# Altium PCB pcb.PcbDoc
Units mil, origin at the board's own origin, x right, y up, seen from the top; angles counter-clockwise.
Board outline 2362.2 x 1181.1 mil, 2 copper layers (Top Layer, Bottom Layer); 40 components, 23 nets, 146 pads, 79 vias.
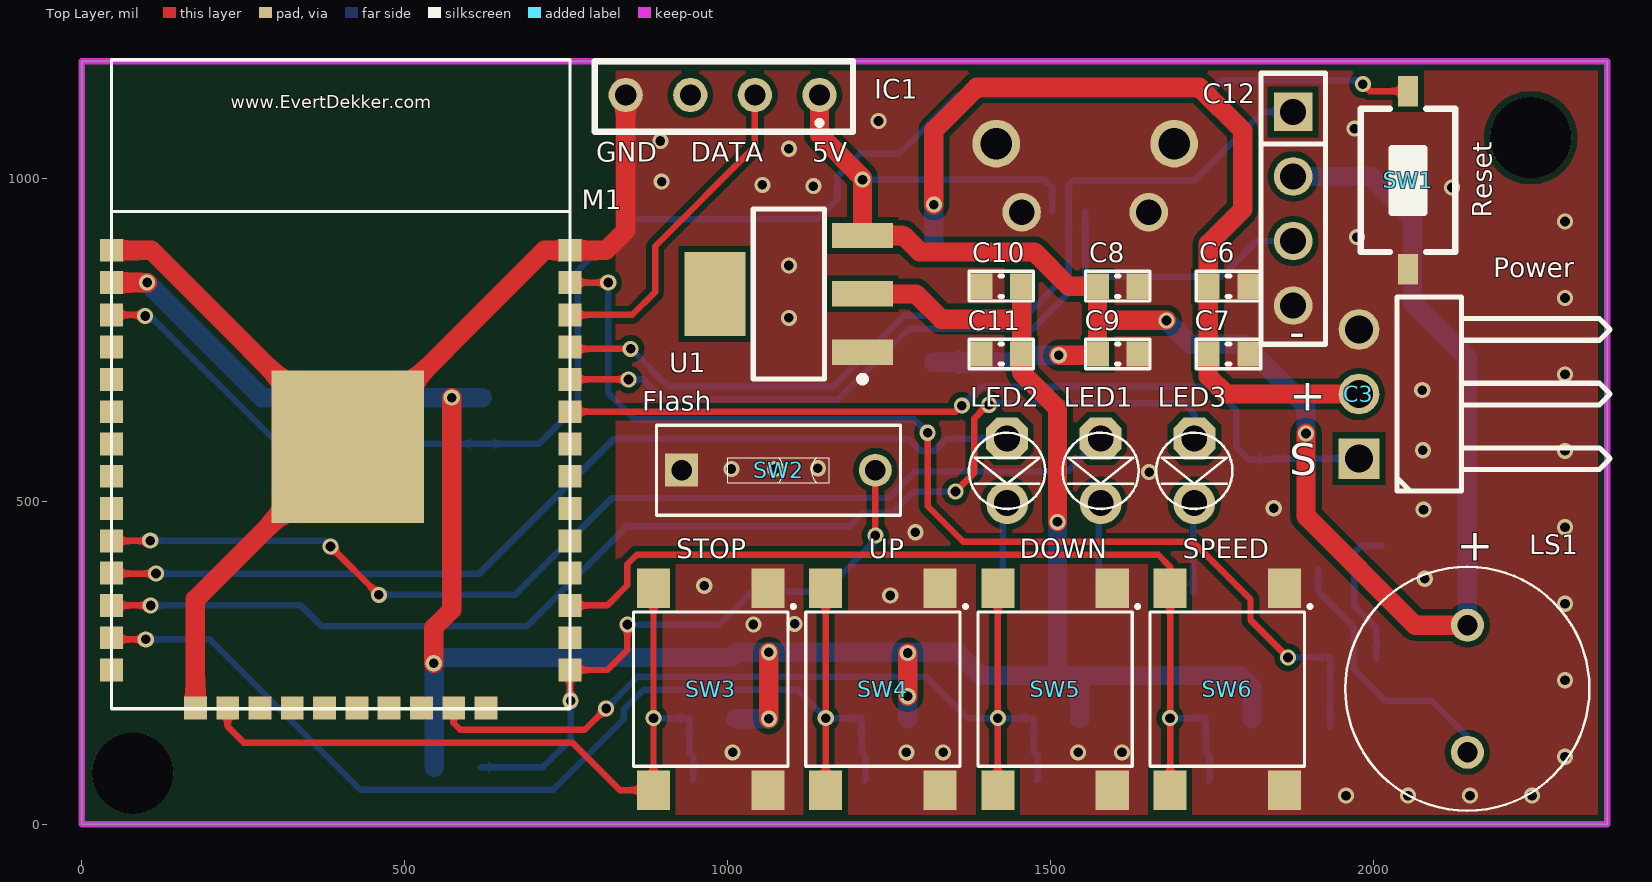
[diagram p0: Top Layer view]
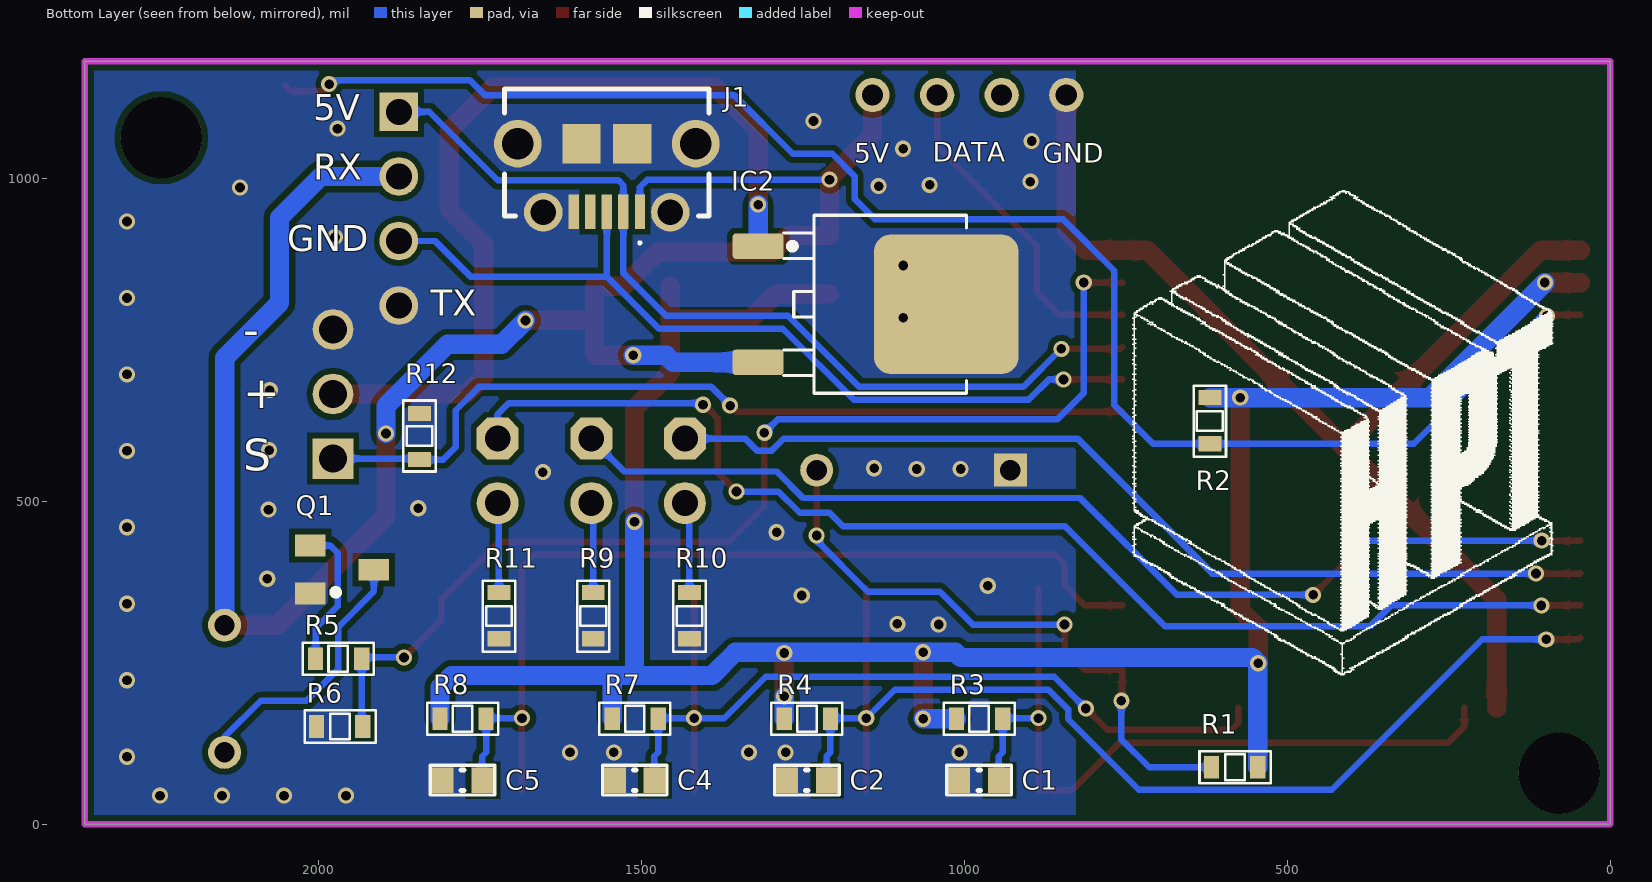
[diagram p1: Bottom Layer view, seen from below]
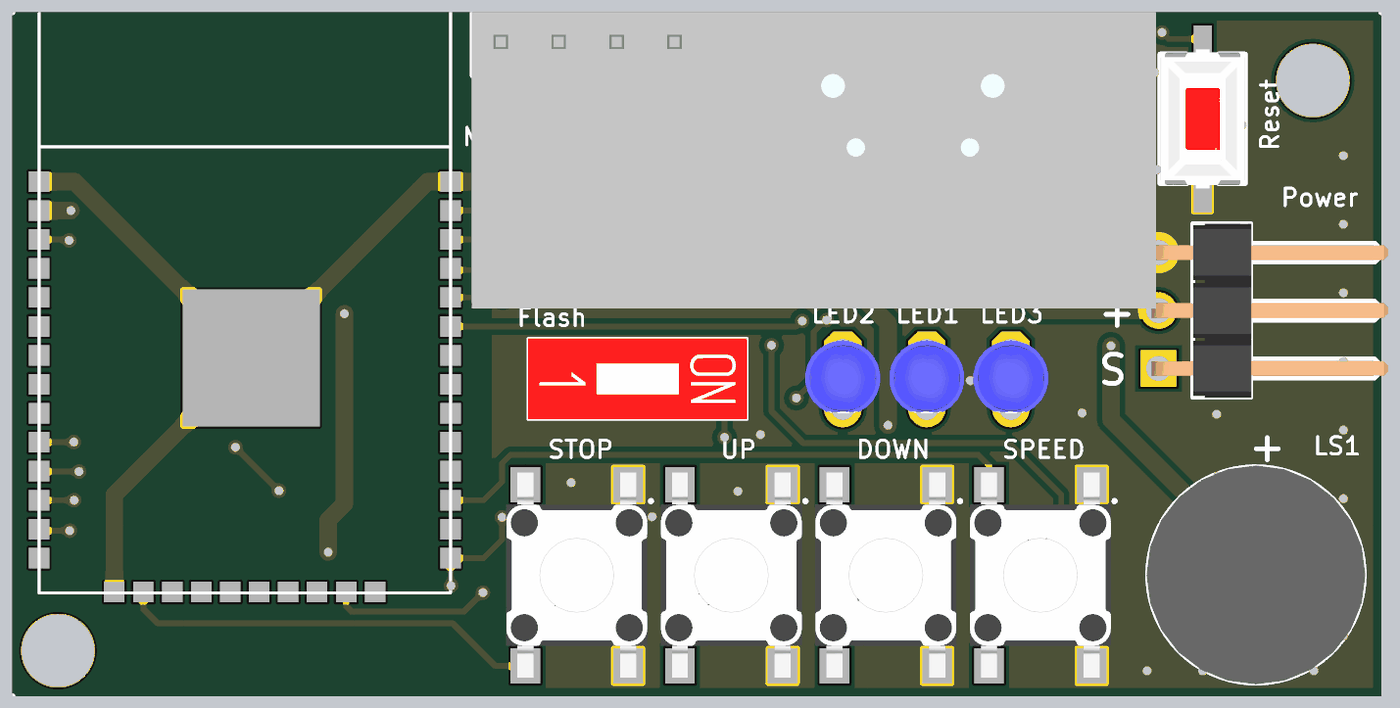
[diagram p2: 3D render of the assembled board from above, using the file's embedded part models]
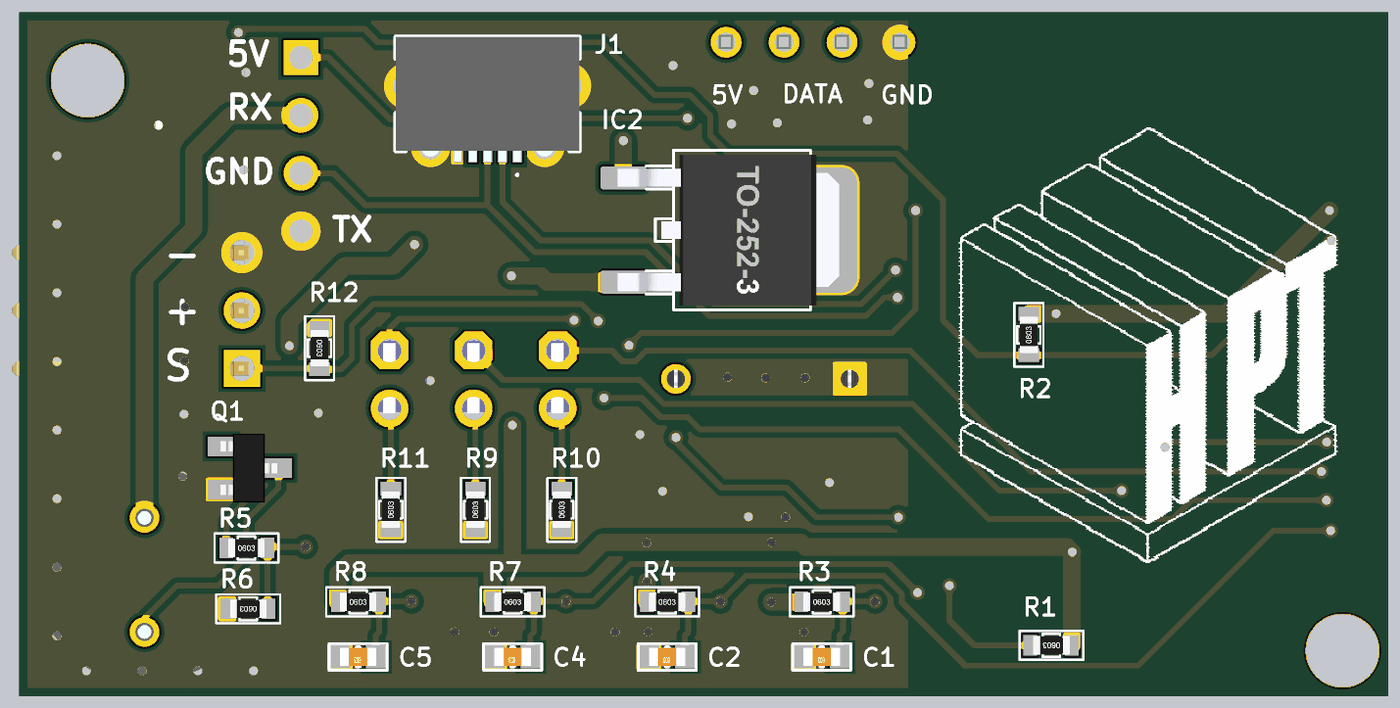
[diagram p3: 3D render of the assembled board from below, using the file's embedded part models]

## Layer stack, top to bottom
Top Solder: solder mask 0.4, Solder Resist, Dk 3.5
Top Layer: signal copper 1.4
Dielectric 1: dielectric 12.6, FR-4, Dk 4.8
Bottom Layer: signal copper 1.4
Bottom Solder: solder mask 0.4, Solder Resist, Dk 3.5

## Board outline
0,0 2362.2,0 2362.2,1181.1 0,1181.1

## Design rules (kind name [scope] priority, off if disabled: settings)
Clearance [All] p1: gap=9
HoleSize [All] p1: absolutevalues=TRUE maxlimit=500 minlimit=1 maxpercent=80.000 minpercent=20.000
HoleToHoleClearance [All] p1: gap=0 allowstackedmicrovias=TRUE
MinimumSolderMaskSliver [All] p1: minsoldermaskwidth=0
PlaneConnect [All] p1: planeconnectstyle=Direct reliefexpansion=20 reliefentries=4 reliefconductorwidth=10 reliefairgap=10
PolygonConnect [All] p1: connectstyle=Direct reliefconductorwidth=10 reliefentries=4 polygonreliefangle="90 Angle" airgapwidth=10
RoutingVias [All] p1: holewidth=15 width=25 viastyle="Through Hole" minholewidth=15 minwidth=25 maxholewidth=28 maxwidth=50
SilkToSilkClearance [All] p1: silktosilkclearance=0
SilkToSolderMaskClearance [IsPad] p1: minsilkscreentomaskgap=0 clearancetoexposedcopper=TRUE
SolderMaskExpansion [All] p1: expansion=4
Width [All] p1: maxlimit=100 minlimit=8 preferedwidth=10
24 further rules are at their usual default settings.

## Components (designator, comment, footprint, x,y, rotation, side; value= is the part's Value field where it differs from the comment)
C1 "10uF" CN-SMD-0603 977.4,68 r0 bottom
C2 "10uF" CN-SMD-0603 1244.06,68 r0 bottom
C3 "Power" JP3-D1C 2078,816 r90 top
C4 "10uF" CN-SMD-0603 1510.73,68 r0 bottom
C5 "10uF" CN-SMD-0603 1777.4,68 r0 bottom
C6 "10uF" CN-SMD-0603 1776,833 r0 top
C7 "10uF" CN-SMD-0603 1776,728 r0 top
C8 "10uF" CN-SMD-0603 1604.5,833 r0 top
C9 "10uF" CN-SMD-0603 1604.5,728 r0 top
C10 "10uF" CN-SMD-0603 1424,833 r180 top
C11 "10uF" CN-SMD-0603 1424,728 r180 top
C12 "JP4" JP4-C1T 1876,1103 r270 top
IC1 "QAM-RX10-433" QAMRX10433 1142.4,1129.1 r180 top locked
IC2 "LM78xx" TO252-123 1174,805 r270 bottom
J1 "10118194-0001LF_BKN" 101181940001LFBKN 1554,1040 r0 bottom
LED1 "LED" LED-3MM-BLUE 1578,542 r270 top
LED2 "LED" LED-3MM-BLUE 1433,542 r270 top
LED3 "LED" LED-3MM-BLUE 1723,542 r270 top
LS1 "CMI-9605-1280T" CMI96051280T 2146,308 r0 top
M1 "ESP32S_Module" ESP32S 46,178.6 r0 top
Q1 "C1815" SOT23B 1964,394 r270 bottom
R1 "10K" RES-SMD-0603 581.01,88 r0 bottom
R2 "10K" RES-SMD-0603 620,624 r90 bottom
R3 "10K" RES-SMD-0603 977.39,163 r180 bottom
R4 "10K" RES-SMD-0603 1244.06,163 r180 bottom
R5 "1K" RES-SMD-0603 1970,256 r180 bottom
R6 "10K" RES-SMD-0603 1967,151 r0 bottom
R7 "10K" RES-SMD-0603 1510.73,163 r180 bottom
R8 "10K" RES-SMD-0603 1777.39,163 r180 bottom
R9 "10K" RES-SMD-0603 1575,322 r90 bottom
R10 "10K" RES-SMD-0603 1426,322 r90 bottom
R11 "10K" RES-SMD-0603 1721,322 r90 bottom
R12 "10K" RES-SMD-0603 1844,601 r270 bottom
SW1 "Reset" SW1-SMD 2054,997 r270 top
SW2 "Flash" SW-DIP1-1 1079,548 r270 top
SW3 "STOP" SW2-SMD 974,209 r270 top
SW4 "UP" SW2-SMD 1240.67,209 r270 top
SW5 "DOWN" SW2-SMD 1507.33,209 r270 top
SW6 "SPEED" SW2-SMD 1774,209 r270 top
U1 "LM1117-3.3V" SOT223 1095,821 r90 top

## Footprints (in the part's own frame and the unit in brackets; to place one, negate y for a bottom-side part, rotate by r counter-clockwise, add the part's x,y. Pads: shape width x height; smd on the part's side, far side on the other; paste and mask are expansions set on the pad)
101181940001LFBKN [mm]
  rect 0.4x1.35 smd: 1(-1.3,2.325) 2(-0.65,2.325) 3(0,2.325) 4(0.65,2.325) 5(1.3,2.325)
  round 1.515 hole 1.01: MH1(-2.5,2.35) MH2(2.5,2.35)
  round 1.875 hole 1.25: MH3(-3.5,-0.35) MH4(3.5,-0.35)
  rect 1.5x1.55 smd: MP1(-1,-0.35) MP2(1,-0.35)
  silkscreen extent -4.03,-2.5 4.03,3.6, body extent -4.02,-2.5 4.03,2.96, height 2.88
CMI96051280T [mm]
  round 1.3 hole 0.8: 1(0,0) 2(0,-5)
  silkscreen extent -4.8,-7.3 4.8,2.3, body extent -4.8,-7.3 4.8,2.3, height 5.6
CN-SMD-0603 [mm]
  rect 0.9x1 smd: 1(-0.8,0) 2(0.8,0)
  silkscreen extent -1.27,-0.58 1.27,0.58, body extent -0.8,-0.4 0.8,0.4, height 0.3
ESP32S [mm] "ESP32S-Module"
  rect 0.9x0.9 smd: 1(0,18.034) 2(0,16.764) 3(0,15.494) 4(0,14.224) 5(0,12.954) 6(0,11.684) 7(0,10.414) 8(0,9.144) 9(0,7.874) 10(0,6.604) 11(0,5.334) 12(0,4.064) 13(0,2.794) 14(0,1.524) 15(3.3,0.034) 16(4.57,0.034) 17(5.84,0.034) 18(7.11,0.034) 19(8.38,0.034) 20(9.65,0.034) 21(10.92,0.034) 22(12.19,0.034) 23(13.46,0.034) 24(14.73,0.034) 25(18.034,1.524) 26(18.034,2.794) 27(18.034,4.064) 28(18.034,5.334) 29(18.034,6.604) 30(18.034,7.874) 31(18.034,9.144) 32(18.034,10.414) 33(18.034,11.684) 34(18.034,12.954) 35(18.034,14.224) 36(18.034,15.494) 37(18.034,16.764) 38(18.034,18.034)
  rect 6x6 smd: 101(9.3,10.3)
  silkscreen extent 0,0 18.03,25.53, body extent 0,0 18.03,25.53, height 2
JP3-D1C [mm] "3 pins, 1 row, right angled, gold plating"
  rect 1.6x1.6 hole 1.1: 1(-6.35,2.54)
  round 1.6 hole 1.1: 2(-3.81,2.54) 3(-1.27,2.54)
  silkscreen extent -7.62,-7.34 0,1.04, body extent -7.62,-7.52 0,2.84, height 2.55
JP4-C1T [mm] "4 row, straight, gold plating"
  rect 1.52x1.52 hole 1.02: 1(0,0)
  round 1.52 hole 1.02: 2(2.54,0) 3(5.08,0) 4(7.62,0)
  silkscreen extent -1.52,-1.27 9.14,1.27
LED-3MM-BLUE [mil]
  oct 65x65 hole 40: 1(-55,0)
  round 65 hole 40: 2(45,0)
  silkscreen extent -64,-59 54,59, body extent -72,-65 54,65, height 184
QAMRX10433 [mm]
  round 1.349 hole 0.83: 1(0,0) 2(2.54,0) 3(5.08,0) 4(7.62,0)
  silkscreen extent -1.32,-1.32 8.84,1.45, body extent -21.11,-1.32 8.89,11.68, height 9.86
RES-SMD-0603 [mm]
  rect 0.6x0.9 smd: 1(-0.889,0) 2(0.927,0)
  silkscreen extent -1.4,-0.64 1.4,0.64, body extent -0.8,-0.4 0.8,0.4, height 0.43
SOT23B [mm] "SOT 23B"
  rect 0.85x1.2 smd: 1(0.94,-1.245) 2(0,1.25) 3(-0.95,-1.25)
  silkscreen extent 0.77,-0.38 1.02,-0.13, body extent -1.5,-1.3 1.5,1.2, height 1.06
SOT223 [mm]
  rect 1x2.4 smd: 1(-2.3,-2.9) 2(0,-2.9) 3(2.3,-2.9)
  rect 3.3x2.4 smd: 4(0,2.9)
  silkscreen extent -3.47,-3.03 3.35,1.4, body extent -3.25,-3.56 3.25,3.4, height 1.68
SW1-SMD [mm]
  rect 1.2x0.8 smd: 1(-3.5,0) 2(3.5,0)
  silkscreen extent -2.82,-1.85 2.82,1.85, body extent -3.05,-1.85 3.05,1.85, height 2.5
SW2-SMD [mm] "6*6mm vertical type, SMD, height 5.0mm, black actuator, 160gf, T&R"
  rect 1.55x1.3 smd: 1(-3.975,2.25) 2(-3.975,-2.25) 3(3.975,-2.25) 4(3.975,2.25)
  silkscreen extent -3.29,-3.04 3.04,3.29, body extent -4.5,-3.1 4.5,3.1, height 4.99
SW-DIP1-1 [mm] "01p, 2.54mm Pitch, Horizontal, Box Type, THT, flat Actuator, red, without Tape, Tube"
  rect 1.3x1.3 hole 0.8: 1(0,-3.81)
  round 1.3 hole 0.8: 2(0,3.81)
  silkscreen extent -1.77,-4.8 1.77,4.8, body extent -1.77,-4.8 1.77,4.8, height 5.4
TO252-123 [mm]
  round 0.5 on Mech15: 0(0,0)
  rrect25% 1x2 smd: 1(-2.285,-3.7) 3(2.285,-3.7)
  rrect25% 5.5x5.7 smd: 2(0,3.7)
  silkscreen extent -3.5,-2.7 3.5,4.5, body extent -3.3,-3.95 3.3,5.76, height 2.31

## Part data
C1 C2 C4 C5 C6 C7 C8 C9 C10 C11: library part CN, "Tu gom"
C3: library part JP3, "WR-PHD 2.54 mm Angled Socket Header"
C12: "WR-PHD 2.54 mm Angled Socket Header"
IC1: "Integrated Circuit"
IC2: "Positive Voltage Regulator"
J1: "Connector"
LED1 LED2 LED3: "LED Single colour Green and Red"
LS1: "Loudspeaker or Buzzer"
M1: "Esp-32S"
Q1: "NPN 600mW, ECB"
R1 R2 R3 R4 R5 R6 R7 R8 R9 R10 R11 R12: library part Res-SMD, "Resistor"
SW1 SW2: library part SW2, "Switch button 2 pin"
SW3 SW4 SW5 SW6: library part SW4, "Switch button 4 pin"
U1: library part LM1117, "800mA Low-Dropout Linear Regulator"

## Free pads (board coordinates)
  round 125.98 hole 125.98: 2(78.74,78.74) 2(2244.09,1062.99)

## Via types
v1: diameter 25, hole 15, Top Layer to Bottom Layer, tented both sides, 79 vias

## Nets (pads, with @x,y where several pads share a name; then routed paths per layer and width w, separated by ;. In a path a pad name is that pad's centre, name@x,y a point inside that pad or via, vN(x,y) a via of type N, cw(c..) or ccw(c..) an arc to the next point about the centre after c; other vN are vias at no path point)
3V3: C10.1 C11.1 M1.2 R1.1 R2.2 R3.1 R4.1 R7.1 R8.1 U1.2 | length 3793.5
  Top Layer w30: M1.2 v1(101.09,838.6) ; v1(545,249) 545,304 573,332 v1(573,660.49) ; v1(1064,163) v1(1064,266) ; U1.2 1292,821 1331,782 1455.5,782 ; v1(1279.06,197.94) v1(1279.06,264.94) ; C10.1 1455.5,782 ; v1(1511,468) 1511,644 1455.5,699.5 C11.1 1455.5,782
  Bottom Layer w30: v1(101.09,838.6) 279.2,660.49 v1(573,660.49) R2.2 ; R1.1 546,248 v1(545,249) 554,258 1006,258 1014,266 v1(1064,266) 1355,266 1391,230 1513,230 ; R3.1 v1(1064,163) ; R4.1 v1(1279.06,197.94) ; v1(1511,468) 1511,232 1513,230 ; R7.1 1545.73,223.27 1539,230 ; R8.1 1812.4,211.6 1794,230 1539,230 ; 1513,230 1539,230
5V: C8.1 C9.1 C12.2 IC1.1 IC2.3 J1.1 LS1.1 U1.3 | length 3085
  Top Layer w30: IC1.1 1142.4,1067.6 v1@1209.17,1000.83 ; v1@1209.17,998 U1.3 1272.45,911.55 1298,886 1475.25,886 1528.25,833 C8.1 1573,780 ; v1(1513,726) 1571,726 C9.1 1573,780 ; v1(1680,780) 1573,780 ; v1(1896,605) 1896,477 2065,308 LS1.1
  Bottom Layer w10: v1(1209,998) 1491,998 1502.82,986.18 J1.1
  Bottom Layer w30: IC2.3 1451.04,715.04 1462,726 v1(1513,726) ; v1(1680,780) 1717,743 1800.47,743 1896,647.47 v1(1896,605) ; C12.2 1997,1003 2061,939 2061,807 2146,722 LS1.1
BTN_DOWN: C4.1 M1.23 R7.2 SW5.2 SW5.3 | length 1398.2
  Top Layer w10: M1.23 575.92,156.08 586,146 779,146 v1(812,179) ; SW5.3 v1(1418.75,164) SW5.2
  Bottom Layer w10: v1(812,179) 861,228 1308,228 1372,164 v1(1418.75,164) 1473.24,164 R7.2 1474.24,111.09 1480.33,105 1480.33,69.1 C4.1
BTN_SPEED: C5.1 M1.27 R8.2 SW6.2 SW6.3 | length 1488.5
  Top Layer w10: M1.27 813.6,338.6 844.83,369.83 844.83,402.22 859.61,417 1667,417 1685.42,398.58 SW6.2 v1(1685.42,164) SW6.3
  Bottom Layer w10: v1(1685.42,164) 1739.91,164 R8.2 1740.91,111.09 1747,105 1747,69.1 C5.1
BTN_STOP: C1.1 M1.16 R3.2 SW3.2 SW3.3 | length 1196.1
  Top Layer w10: M1.16 225.92,151.08 251,126 760,126 833.5,52.5 SW3.3 v1(885.42,164) SW3.2
  Bottom Layer w10: v1(885.42,164) 939.91,164 R3.2 940.91,111.09 947,105 947,69.1 C1.1
BTN_UP: C2.1 M1.13 R4.2 SW4.2 SW4.3 | length 1761.8
  Top Layer w10: M1.13 48.6,286 v1(99,286) ; SW4.3 v1(1152.08,164) SW4.2
  Bottom Layer w10: v1(99,286) 198,286 431,53 730,53 839.5,162.5 839.5,177.5 870,208 1108.08,208 v1(1152.08,164) 1206.58,164 R4.2 1207.57,111.09 1213.67,105 1213.67,69.1 C2.1
BUZZER: M1.37 R5.2 R6.1 | length 1710.2
  Top Layer w10: M1.37 v1(815.4,838.6) ; v1(1310,606) 1310,492 1365,437 1721,437 1810,348 1810,316 v1(1868,258)
  Bottom Layer w10: v1(815.4,838.6) 815.4,667.6 856,627 1289,627 v1(1310,606) ; v1(1868,258) 1931.52,258 R5.2 1933.51,152.52 R6.1
DATA_RF: IC1.2 M1.36 | length 515.7
  Top Layer w10: M1.36 852.6,788.6 888,824 888,895 1042.4,1049.4 IC1.2
GND: C1.2 C2.2 C3.3 C4.2 C5.2 C6.2 C7.2 C8.2 C9.2 C10.2 C11.2 C12.4 IC1.4 IC2.2 J1.5 J1.MH1 J1.MH2 J1.MH3 J1.MH4 J1.MP1 J1.MP2 M1.1 M1.15 M1.38 M1.101 Q1.1 R6.2 R9.1 R10.1 R11.1 R12.1 SW1.2 SW2.1 SW3.1 SW3.4 SW4.1 SW4.4 SW5.1 SW5.4 SW6.1 SW6.4 U1.1 | length 1773.1
  Top Layer w30: M1.1 107.65,888.6 M1.101 ; M1.15 175.92,347.89 M1.101 ; IC1.4 842.4,919.4 811.6,888.6 M1.38 716.63,888.6 M1.101
  other v1: 1958,44 2054,44 2150,44 2246,44 2297,104.29 1008,111 1277,111 1334,111 1543,111 1611,111 2297,222.71 1040,309 1104,310 2297,341.14 1252,354 964,369 2080,380 1291,452 2297,459.57 2078,487 1846,489 1653,545 1006,550 1074,550 1140,551 2297,578 2077,579 2076,672 2297,696.43 1095,784 2297,814.86 1095,865 1975,909 2297,933.29 2122,986 1133,988 1054,990 898,995 1095,1046 896,1058 1971,1077 1234,1089
LED_B: LED3.1 M1.12 | length 1930.2
  Top Layer w10: M1.12 v1(106.6,338.6) ; v1(1353,515) 1382.5,544.5 1382.5,628.61 1390.5,636.61 1390.5,637.5 1402.5,649.5 v1(1404.93,649.5)
  Bottom Layer w10: v1(106.6,338.6) 339.4,338.6 372,306 689,306 844,461 1188,461 1209.05,482.05 1255.34,482.05 1288.28,515 v1(1353,515) ; v1(1404.93,649.5) 1404.93,652.07 1705.93,652.07 1723,635 LED3.1
LED_G: LED2.1 M1.11 | length 1489.1
  Top Layer w10: M1.11 46.6,388 v1(115,388)
  Bottom Layer w10: v1(115,388) 616,388 825,597 1280.11,597 1298.61,578.5 1321.39,578.5 1339.89,597 LED2.1
LED_R: LED1.1 M1.10 | length 1667.2
  Top Layer w10: M1.10 105.6,438.6 v1(106,439) ; v1(385,430) v1(460,355)
  Bottom Layer w10: v1(106,439) 376,439 v1(385,430) ; v1(460,355) 671,355 821,505 1250,505 1291,546 1527,546 LED1.1
MOTOR_SPEED: C3.1 M1.33 R12.2 | length 1318.5
  Top Layer w10: M1.33 1353.6,638.6 v1(1363,648)
  Bottom Layer w10: v1(1363,648) 1392,677 1752,677 1788,641 1788,584 1807.49,564.51 R12.2 1845.48,566 C3.1
NetLED1_2: LED1.2 R9.2 | length 139.8
  Bottom Layer w10: R9.2 1575,494 LED1.2
NetLED2_2: LED2.2 R10.2 | length 141.4
  Bottom Layer w10: R10.2 1426,490 LED2.2
NetLED3_2: LED3.2 R11.2 | length 139.3
  Bottom Layer w10: R11.2 1721,495 LED3.2
NetLS1_2: LS1.2 Q1.2 | length 420.1
  Bottom Layer w10: Q1.2 1914.79,360.21 1970,305 1970,240.26 2019.26,191 2090,191 2146,135 LS1.2
NetM1_3: M1.3 R2.1 SW1.1 | length 2474.9
  Top Layer w10: M1.3 96.4,788.6 v1(98,787) ; v1(1984,1146) 1995,1135 2043.2,1135 SW1.1@2052,1143.8
  Bottom Layer w10: v1(98,787) 106,787 304,589 R2.1 708,589 768,649 768,857 848,937 1139,937 1170,968 1170,1003 1205,1038 1266,1038 1357,1129 1743,1129 1766,1152 1978,1152 v1(1984,1146)
NetM1_25: M1.25 R1.2 SW2.2 | length 953.2
  Top Layer w10: v1(757,191) 756,192 M1.25 813.6,238.6 845,270 v1(845,309) ; v1(1229,447) SW2.2
  Bottom Layer w10: R1.2 714,88 757,131 v1(757,191) ; v1(845,309) 987,309 1038,360 1150,360 1229,439 v1(1229,447)
NetQ1_3: Q1.3 R5.1 | length 225
  Bottom Layer w10: R5.1 2005,303.43 1971,337.43 1971,420 1982.4,431.4 Q1.3
RX: C12.1 J1.2 M1.35 | length 1401.6
  Top Layer w10: M1.35 758.6,736 v1(850,736)
  Bottom Layer w10: v1(850,736) 909,677 1163,677 1273,787 1462,787 1528.41,853.41 J1.2 1528.41,989.41 1536,997 1723,997 1829,1103 C12.1
TX: C12.3 J1.3 M1.34 | length 1335.5
  Top Layer w10: M1.34 v1(846.6,688.6)
  Bottom Layer w10: v1(846.6,688.6) 869.11,688.6 900.72,657 1171.28,657 1281.28,767 1473,767 1554,848 ; J1.3 1554,848 ; C12.3 1820,903 1765,848 1554,848
VIN: C3.2 C6.1 C7.1 IC2.1 | length 1360.8
  Top Layer w30: v1(1319.67,959.33) 1319.67,1074.67 1386,1141 1731,1141 1798,1074 1798,952 1744.5,898.5 C6.1 C7.1 1744.5,693.5 1772,666 C3.2
  Bottom Layer w30: IC2.1 v1(1319.67,959.33)
pads on no net: IC1.3 IC2.0 J1.4 M1.4 M1.5 M1.6 M1.7 M1.8 M1.9 M1.14 M1.17 M1.18 M1.19 M1.20 M1.21 M1.22 M1.24 M1.26 M1.28 M1.29 M1.30 M1.31 M1.32 U1.4

## Polygon pours and split planes (outlines as drawn)
GND on Top Layer "Top Layer-No Net" (solid, remove dead copper, pour order 0): 2362.2,1181.1 2362.2,0 827,0 827,1181.1 2362.2,1181.1
GND on Bottom Layer "Top Layer-No Net" (solid, remove dead copper, pour order 2): 2362.2,1181.1 828,1181.1 828,0 2362.2,0

## Keep-outs
Keep-Out Layer:
  the board outline again, w10

## Silkscreen, mask and mechanical layers (free items; w line width, h text height)
Top Overlay:
  text "GND" at 797,1026 h30
  text "DATA" at 943,1026 h30
  text "5V" at 1131,1026 h30
  text "-" at 1870,738 h50
  text "+" at 1870,640 h50
  text "S" at 1870,540 h50
  text "+" at 2129.34,408 h50
Bottom Overlay:
  drawing of 2330 lines, arcs and shapes, not listed
  text "5V" at 2009.01,1090 h40
  text "DATA" at 1049,1026 h30
  text "GND" at 879,1024 h30
  text "5V" at 1171,1024 h30
  text "RX" at 2009.01,998 h40
  text "GND" at 2049,887 h40
  text "TX" at 1827,787 h40
  text "-" at 2117,741 h50
  text "+" at 2117,644 h50
  text "S" at 2117,547 h50

## Dimensions
0,1181.1 to 0,0 on Top Overlay
0,1181.1 to 2362.2,1181.1 on Top Overlay

## Text inside footprints (layer, text, board x,y; h text height)
M1: Top Overlay "www.EvertDekker.com" at 231,1108.6 h19.68